# Altium PCB JHZ-E01S-HW-Sensor-X3-S0.1-光编码avago-20160919.PcbDoc
Units mil, origin at the board's own origin, x right, y up, seen from the top; angles counter-clockwise.
Board outline 944.88 x 787.4 mil, 2 copper layers (Top Layer, Bottom Layer); 3 components, 4 nets, 10 pads, 17 vias.
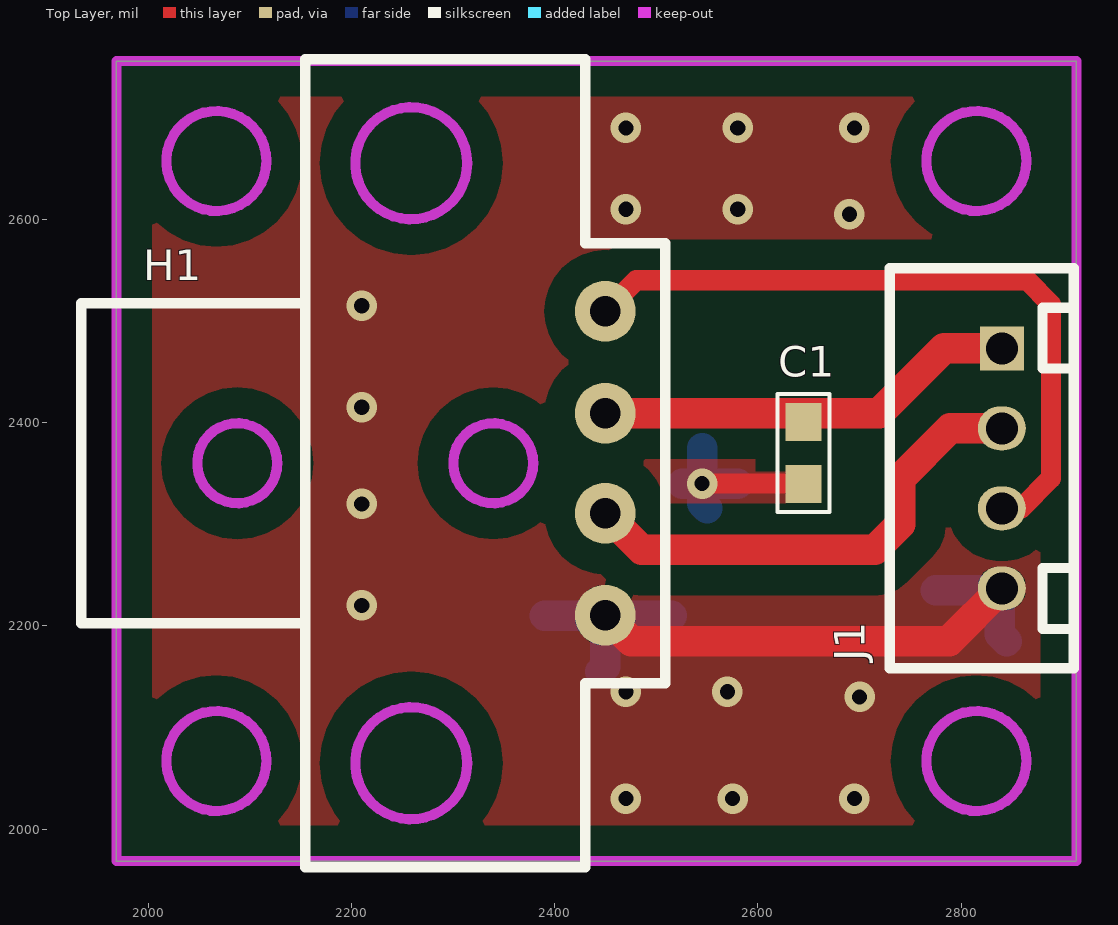
[diagram p0: Top Layer view]
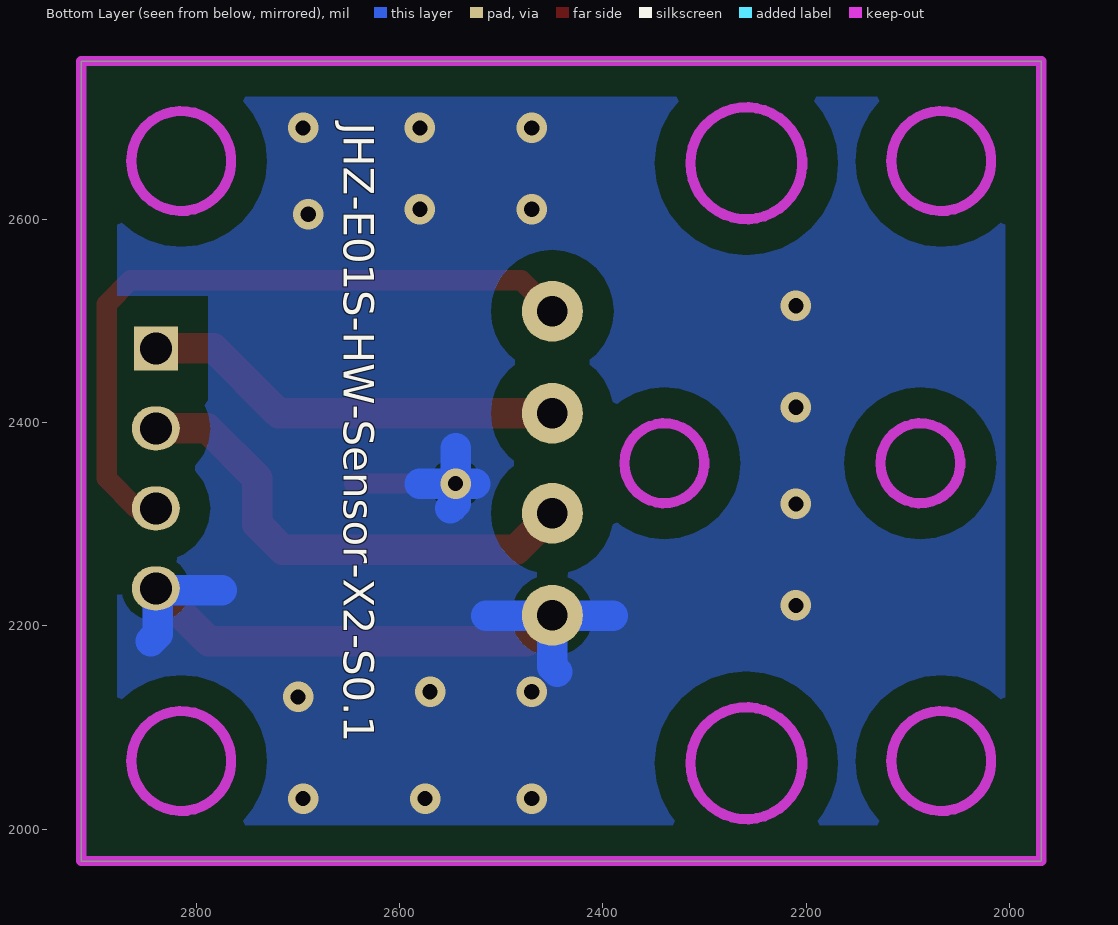
[diagram p1: Bottom Layer view, seen from below]

## Layer stack, top to bottom
Top Layer: signal copper 1.4
Dielectric: dielectric 12.6, FR-4, Dk 4.8
Bottom Layer: signal copper 1.4

## Board outline
1968.5,1968.5 2913.39,1968.5 2913.39,2755.91 1968.5,2755.91

## Design rules (kind name [scope] priority, off if disabled: settings)
Clearance [All] p1: gap=10
PolygonConnect [IsVia] p1: connectstyle=Direct reliefconductorwidth=10 reliefentries=4 polygonreliefangle="90 Angle" airgapwidth=10
RoutingVias [All] p1: holewidth=28 width=50 viastyle="Through Hole" minholewidth=15 minwidth=30 maxholewidth=28 maxwidth=50
SilkToSolderMaskClearance [IsPad] p1: minsilkscreentomaskgap=1 clearancetoexposedcopper=TRUE
SolderMaskExpansion [All] p1: expansion=4
Width [All] p1: maxlimit=100 minlimit=10 preferedwidth=10 minimp=50.000000 maximp=50.000000 favimp=50.000000
27 further rules are at their usual default settings.

## Components (designator, comment, footprint, x,y, rotation, side; value= is the part's Value field where it differs from the comment)
C1 "MCC0603" C0603_M1608 2645,2370 r270 top
H1 "HEDS-973x" HEDS-973x 2430,2360 r180 top locked
J1 "PH-A-4P" PH-A-4P 2840,2355 r270 top

## Footprints (in the part's own frame and the unit in brackets; to place one, negate y for a bottom-side part, rotate by r counter-clockwise, add the part's x,y. Pads: shape width x height; smd on the part's side, far side on the other; paste and mask are expansions set on the pad)
C0603_M1608 [mm] "Chip Capacitor, 2-Leads, Body 1.6x0.8mm, IPC Medium Density"
  rect 0.95x0.9 smd: 1(-0.775,0) 2(0.775,0)
  silkscreen extent -1.48,-0.65 1.48,0.65
HEDS-973x [mil]
  round 60 hole 30: 1(-19.68,-149.61) 2(-19.68,-49.21) 3(-19.68,49.21) 4(-19.68,149.61)
  Keep-Out Layer circle w10: c90.55,0 r39.37
  Keep-Out Layer circle w10: c342.52,0 r39.37
  Keep-Out Layer circle w10: c171.26,-295.28 r55.12
  Keep-Out Layer circle w10: c171.26,295.28 r55.12
  silkscreen extent -79,-398 496,398
PH-A-4P [mm]
  rect 1.1x1.1 hole 0.8: 1(-3,0)
  oval 1.1x1.2 hole 0.8: 2(-1,0) 3(1,0) 4(3,0)
  silkscreen extent -5,-2.8 5,1.8

## Part data
C1: "Multilayer Ceramic Capacitor 0603"
J1: "Header, 2.0mm,4-Pin"

## Via types
v1: diameter 30, hole 15, Top Layer to Bottom Layer, 17 vias

## Nets (pads, with @x,y where several pads share a name; then routed paths per layer and width w, separated by ;. In a path a pad name is that pad's centre, name@x,y a point inside that pad or via, vN(x,y) a via of type N, cw(c..) or ccw(c..) an arc to the next point about the centre after c; other vN are vias at no path point)
CHA: H1.3 J1.2 | length 480.9
  Top Layer w30: H1.3 2485.47,2275 2715,2275 2740,2300 2740,2345 2789.37,2394.37 J1.2
CHB: H1.1 J1.3 | length 693.1
  Top Layer w20: H1.1 2480.08,2540 2865,2540 2888.39,2516.61 2888.39,2345 2859.02,2315.63 J1.3
GND: C1.2 H1.4 J1.4 | length 936.9
  Top Layer w20: v1(2545,2340) 2644.49,2340 C1.2
  Top Layer w30: H1.4 2475.08,2185 2788.11,2185 J1.4
  Bottom Layer w30: 2390,2210 H1.4@2449.68,2210 ; 2445,2155 2449.68,2159.68 H1.4@2449.68,2210 ; H1.4 H1.4@2449.68,2210 ; 2515,2210 H1.4@2449.68,2210 ; 2525.5,2340 v1(2545,2340) ; 2545,2375 v1(2545,2340) ; 2550,2315.5 2545,2320.5 v1(2545,2340) ; 2580,2340 v1(2545,2340) ; 2775,2235 2838.11,2235 2838.11,2191.89 2845,2185
  other v1: 2470,2030 2575,2030 2695,2030 2700,2130 2470,2135 2570,2135 2210,2220 2210,2320 2210,2415 2210,2515 2690,2605 2470,2610 2580,2610 2470,2690 2580,2690 2695,2690
VCC: C1.1 H1.2 J1.1 | length 416.8
  Top Layer w30: H1.2 2719.21,2409.21 2783.11,2473.11 J1.1

## Polygon pours and split planes (outlines as drawn)
GND on Top Layer "Top Layer-No Net 1" (solid, remove dead copper, pour order 4): 1968.74,2755.3 2913.62,2755.3 2913.62,1967.9 1968.74,1967.9
GND on Bottom Layer "Top Layer-No Net 1" (solid, remove dead copper, pour order 3): 1968.59,2758.78 2913.47,2758.78 2913.47,1971.38 1968.59,1971.38

## Keep-outs
Keep-Out Layer:
  circle w10: c2066.93,2657.48 r49.21
  circle w10: c2066.93,2066.93 r49.21
  circle w10: c2814.96,2066.93 r49.21
  circle w10: c2814.96,2657.48 r49.21
  lines w10: 1968.5,1968.5 1968.5,2755.91 2913.39,2755.91 2913.39,1968.5 1968.5,1968.5

## Silkscreen, mask and mechanical layers (free items; w line width, h text height)
Bottom Overlay:
  text "JHZ-E01S-HW-Sensor-X2-S0.1" at 2655,2695 h30 r90